# EAGLE board RiadenieMotorovL293Dz (EAGLE 6.4)
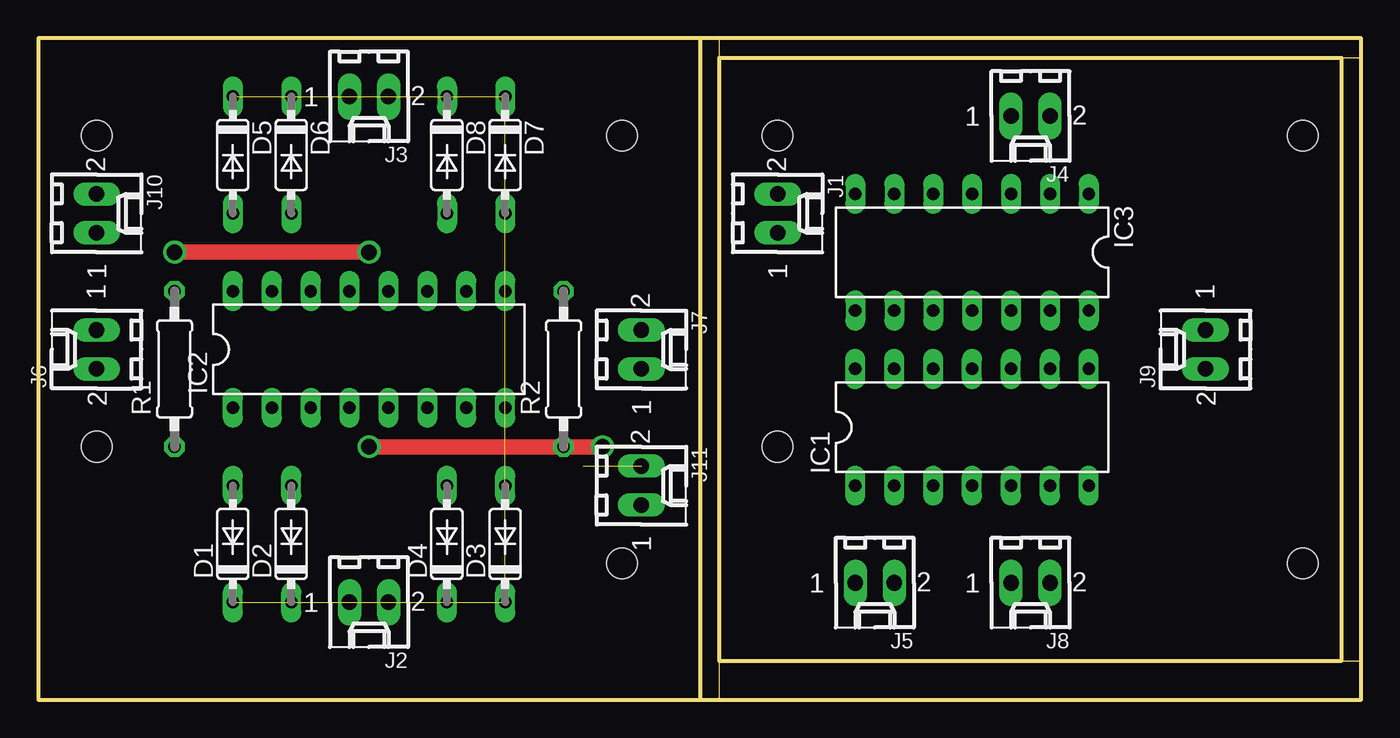
[diagram p0: board, top side]
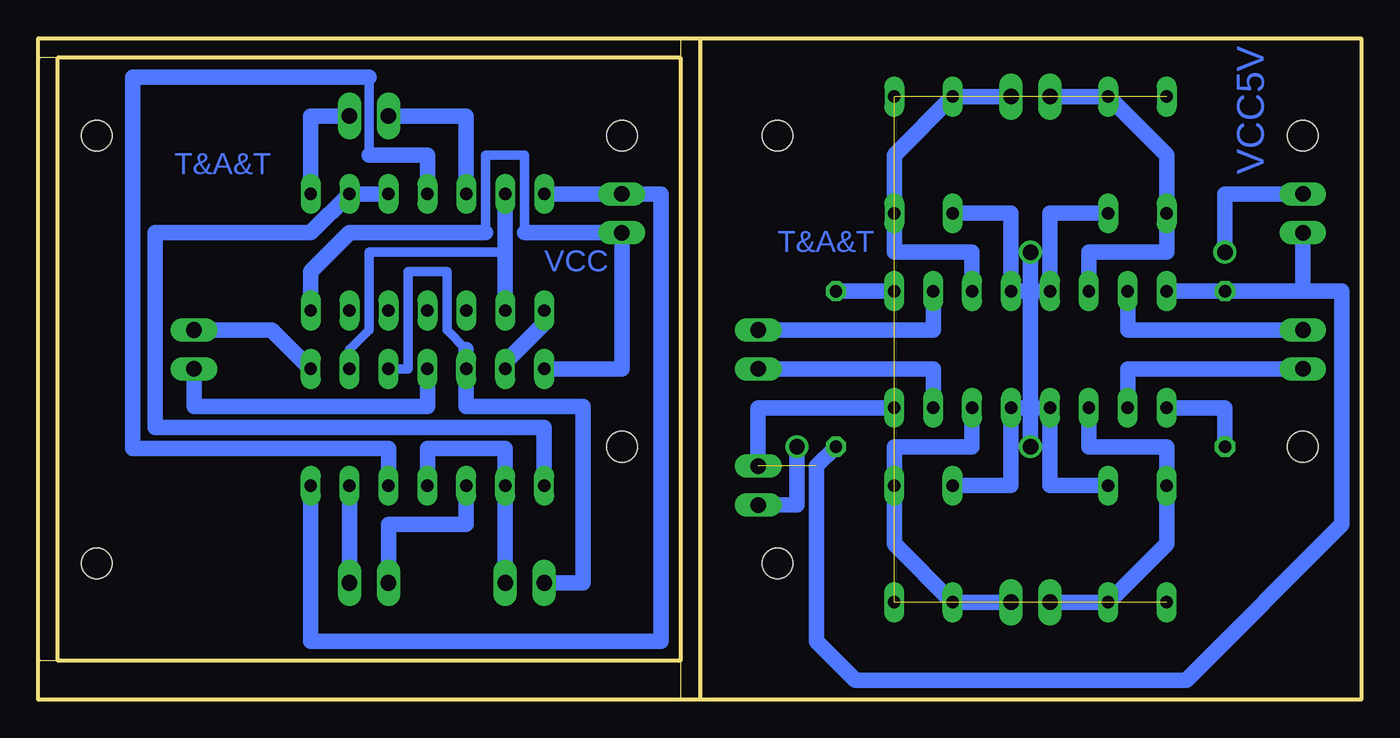
[diagram p1: board, bottom side, seen from below]

Size 86.36 x 43.18 mm. Coordinates in mm from the lower left corner, seen from the top.
Outline: 43.18,0 0,0 0,43.17 86.36,43.17 86.36,41.91
Outline: 43.18,0 44.45,0
Outline: 44.45,0 86.36,0 86.36,2.54
Outline: 86.36,2.54 86.36,41.91
Outline: 43.18,43.18 43.18,0
Outline: 44.45,43.18 44.45,41.91
Outline: 44.45,41.91 44.45,2.54
Outline: 44.45,2.54 44.45,0
Outline: 44.45,41.91 85.09,41.91
Outline: 85.09,41.91 86.36,41.91
Outline: 44.45,2.54 85.09,2.54
Outline: 85.09,2.54 86.36,2.54
Outline: 85.09,2.54 85.09,41.91
Copper layers (1*16): Top 0.035mm / dielectric 1.5mm / Bottom 0.035mm
Design rules "default": minimum track width 10mil, minimum drill 24mil, track to track 8mil, track to pad 8mil, pad to pad 8mil, via to via 8mil, smd to smd 8mil, copper to edge 40mil, drill to drill 8mil, minimum pad ring 10mil, minimum via ring 8mil, stop-mask expansion 4mil, vias tented up to drill 0mil, thermal gap 10mil
Holes 2 mm at 3.81,16.51 3.81,36.83 38.1,36.83 38.1,8.89 48.26,16.51 48.26,36.83 82.55,36.83 82.55,8.89

## Footprints (pad centres in the part's own frame; a part is rotated, then mirrored left to right if it is on the bottom)
DO35-7 = drill 0.813 long: A 3.81,0; C -3.81,0
DIL14 = drill 0.813 long: 1 -7.62,-3.81; 2 -5.08,-3.81; 3 -2.54,-3.81; 4 0,-3.81; 5 2.54,-3.81; 6 5.08,-3.81; 7 7.62,-3.81; 8 7.62,3.81; 9 5.08,3.81; 10 2.54,3.81; 11 0,3.81; 12 -2.54,3.81; 13 -5.08,3.81; 14 -7.62,3.81
DIL16 = drill 0.813 long: 1 -8.89,-3.81; 2 -6.35,-3.81; 3 -3.81,-3.81; 4 -1.27,-3.81; 5 1.27,-3.81; 6 3.81,-3.81; 7 6.35,-3.81; 8 8.89,-3.81; 9 8.89,3.81; 10 6.35,3.81; 11 3.81,3.81; 12 1.27,3.81; 13 -1.27,3.81; 14 -3.81,3.81; 15 -6.35,3.81; 16 -8.89,3.81
6410-02 = drill 1.016 long: 1 1.27,0; 2 -1.27,0
0207/10 = drill 0.813 octagon: 1 -5.08,0; 2 5.08,0

## Placement (x,y rotation side)
D1  1N4148DO35-7  [DO35-7]  12.7,10.16 90 top
D2  1N4148DO35-7  [DO35-7]  16.51,10.16 90 top
D3  1N4148DO35-7  [DO35-7]  30.48,10.16 90 top
D4  1N4148DO35-7  [DO35-7]  26.67,10.16 90 top
D5  1N4148DO35-7  [DO35-7]  12.7,35.56 270 top
D6  1N4148DO35-7  [DO35-7]  16.51,35.56 270 top
D7  1N4148DO35-7  [DO35-7]  30.48,35.56 270 top
D8  1N4148DO35-7  [DO35-7]  26.67,35.56 270 top
IC1  74AC08N  [DIL14]  60.96,17.78 0 top
IC2  L293D  [DIL16]  21.59,22.86 0 top
IC3  74AC04N  [DIL14]  60.96,29.21 180 top
J1  22-27-2021-02  [6410-02]  48.26,31.75 270 top
J2  22-27-2021-02  [6410-02]  21.59,6.35 180 top
J3  22-27-2021-02  [6410-02]  21.59,39.37 180 top
J4  22-27-2021-02  [6410-02]  64.77,38.1 180 top
J5  22-27-2021-02  [6410-02]  54.61,7.62 180 top
J6  22-27-2021-02  [6410-02]  3.81,22.86 90 top
J7  22-27-2021-02  [6410-02]  39.37,22.86 270 top
J8  22-27-2021-02  [6410-02]  64.77,7.62 180 top
J9  22-27-2021-02  [6410-02]  76.2,22.86 90 top
J10  22-27-2021-02  [6410-02]  3.81,31.75 270 top
J11  22-27-2021-02  [6410-02]  39.37,13.97 270 top
R1  10k  [0207/10]  8.89,21.59 90 top
R2  10k  [0207/10]  34.29,21.59 90 top

## Library data of the parts
D1-D8 = diode
IC1 IC3 = 74xx-eu
IC2 = st-microelectronics; MPN: L293D; OC_FARNELL: 9589619; OC_NEWARK: 56P8249
J1-J11 = con-molex; OC_FARNELL: unknown; OC_NEWARK: unknown
R1 R2 = resistor

## Nets
1A: IC2.2 J6.2
1A1: IC1.3 J8.1
2A: IC2.7 J7.1
2A1: IC1.6 J8.2
3A: IC2.10 J7.2
3A1: IC1.8 J9.1
4A: IC2.15 J6.1
4A1: IC1.11 J9.2
GND1: IC1.7 IC3.7 J1.2
GND2: D2.A D4.A D6.A D8.A IC2.4 IC2.5 IC2.12 IC2.13 J10.2 J11.1
M1: IC3.1 J4.2
M2: IC3.5 J4.1
M11: D1.A D2.C IC2.3 J2.1
M12: D3.A D4.C IC2.6 J2.2
M21: D5.A D6.C IC2.14 J3.1
M22: D7.A D8.C IC2.11 J3.2
N$1: IC2.1 R1.1
N$2: IC2.9 R2.2
PWM_M1: IC1.2 IC1.4 J5.2
PWM_M2: IC1.10 IC1.12 J5.1
ULEFT1: IC1.1 IC3.2 IC3.3
ULEFT2: IC1.9 IC3.6 IC3.9
URIGHT1: IC1.5 IC3.4
URIGHT2: IC1.13 IC3.8
VCC1: IC1.14 IC3.14 J1.1
VCC2: IC2.8 IC2.16 J10.1 J11.2 R1.2 R2.1
VCC_M: D1.C D3.C D5.C D7.C

## Tracks (layer width: path | path; a pad name or v marks a point on that pad's centre or on a via)
1A
  Bottom 1.016: IC2.2 15.24,21.59 J6.2
1A1
  Bottom 1.016: IC1.3 58.42,11.43 63.5,11.43 J8.1
2A
  Bottom 1.016: IC2.7 27.94,21.59 J7.1
2A1
  Bottom 1.016: IC1.6 J8.2
3A
  Bottom 1.016: IC2.10 27.94,24.13 J7.2
3A1
  Bottom 1.016: IC1.8 71.12,24.13 J9.1
4A
  Bottom 1.016: IC2.15 15.24,24.13 J6.1
4A1
  Bottom 1.016: IC1.11 60.96,19.15 76.2,19.15 J9.2
GND1
  Bottom 1.016: IC3.7 J1.2 45.72,33.02 45.72,3.81 68.58,3.81 IC1.7
GND2  (via drill 1)
  Top 1.016: v8.89,29.21 v21.59,29.21 | v36.83,16.51 v21.59,16.51
  Bottom 1.016: D2.A 20.32,13.97 IC2.4 21.59,19.05 | D4.A 22.86,13.97 IC2.5 21.59,19.05 | D6.A 20.32,31.75 IC2.13 21.59,26.67 | D8.A 22.86,31.75 IC2.12 21.59,26.67 | 21.59,26.67 21.59,19.05 | J10.2 8.89,33.02 v8.89,29.21 | v21.59,29.21 21.59,26.67 | J11.1 36.83,12.7 v36.83,16.51 | v21.59,16.51 21.59,19.05
M1
  Bottom 1.016: IC3.1 68.58,38.1 J4.2
M2
  Bottom 1.016: J4.1 58.42,38.1 IC3.5
M11
  Bottom 1.016: IC2.3 17.78,16.51 12.7,16.51 D1.A 12.7,10.16 D2.C J2.1
M12
  Bottom 1.016: IC2.6 25.4,16.51 30.48,16.51 D3.A 30.48,10.16 D4.C J2.2
M21
  Bottom 1.016: J3.1 D6.C 12.7,35.56 D5.A 12.7,29.21 17.78,29.21 IC2.14
M22
  Bottom 1.016: J3.2 D8.C 30.48,35.56 D7.A 30.48,29.21 25.4,29.21 IC2.11
N$1
  Bottom 1.016: IC2.1 8.89,19.05 R1.1
N$2
  Bottom 1.016: IC2.9 R2.2
PWM_M1
  Bottom 1.016: J5.2 IC1.2 55.88,16.4 60.96,16.4 IC1.4
PWM_M2
  Bottom 0.61: 58.42,22.86 59.69,24.13 59.69,27.94 62.23,27.94 62.23,21.59 IC1.10
  Bottom 1.016: 58.42,22.86 IC1.12 58.42,19.15 50.8,19.15 50.8,7.62 J5.1
ULEFT1
  Bottom 1.016: IC1.1 53.34,17.78 78.74,17.78 78.74,30.48 68.58,30.48 IC3.2 IC3.3
ULEFT2
  Bottom 0.61: IC1.9 66.04,22.86 64.77,24.13 64.77,29.21 55.88,29.21
  Bottom 1.016: IC3.6 55.88,29.21 IC3.9
URIGHT1
  Bottom 0.61: 64.77,35.56 64.77,40.64
  Bottom 1.016: IC1.5 63.5,16.4 80.2,16.4 80.2,40.64 64.77,40.64 | 64.77,35.56 60.96,35.56 IC3.4
URIGHT2
  Bottom 1.016: IC1.13 55.88,22 53.34,24.54 IC3.8
VCC1
  Bottom 0.61: 57.15,30.48 57.15,35.56 54.61,35.56 54.61,30.48
  Bottom 1.016: IC1.14 48.26,21.59 J1.1 54.61,30.48 | IC3.14 68.58,27.94 66.04,30.48 57.15,30.48
VCC2  (1 unrouted)
  Bottom 1.016: IC2.16 R1.2 3.81,26.67 | J10.1 3.81,26.67 | R2.1 35.56,15.24 35.56,3.81 33.02,1.27 11.43,1.27 1.27,11.43 1.27,26.67 3.81,26.67 | IC2.8 39.37,19.05 J11.2
VCC_M  (3 unrouted)

## Text on the board
Bottom: VCC5V | T&A&T | T&A&T | VCC